# Altium PCB RS-119-8912.PcbDoc (part 1 of 2)
Units mm, origin at the board's own origin, x right, y up, seen from the top; angles counter-clockwise.
Board outline 125 x 120.8 mm, 2 copper layers (Top Layer, Bottom Layer); 161 components, 141 nets, 539 pads, 141 vias.
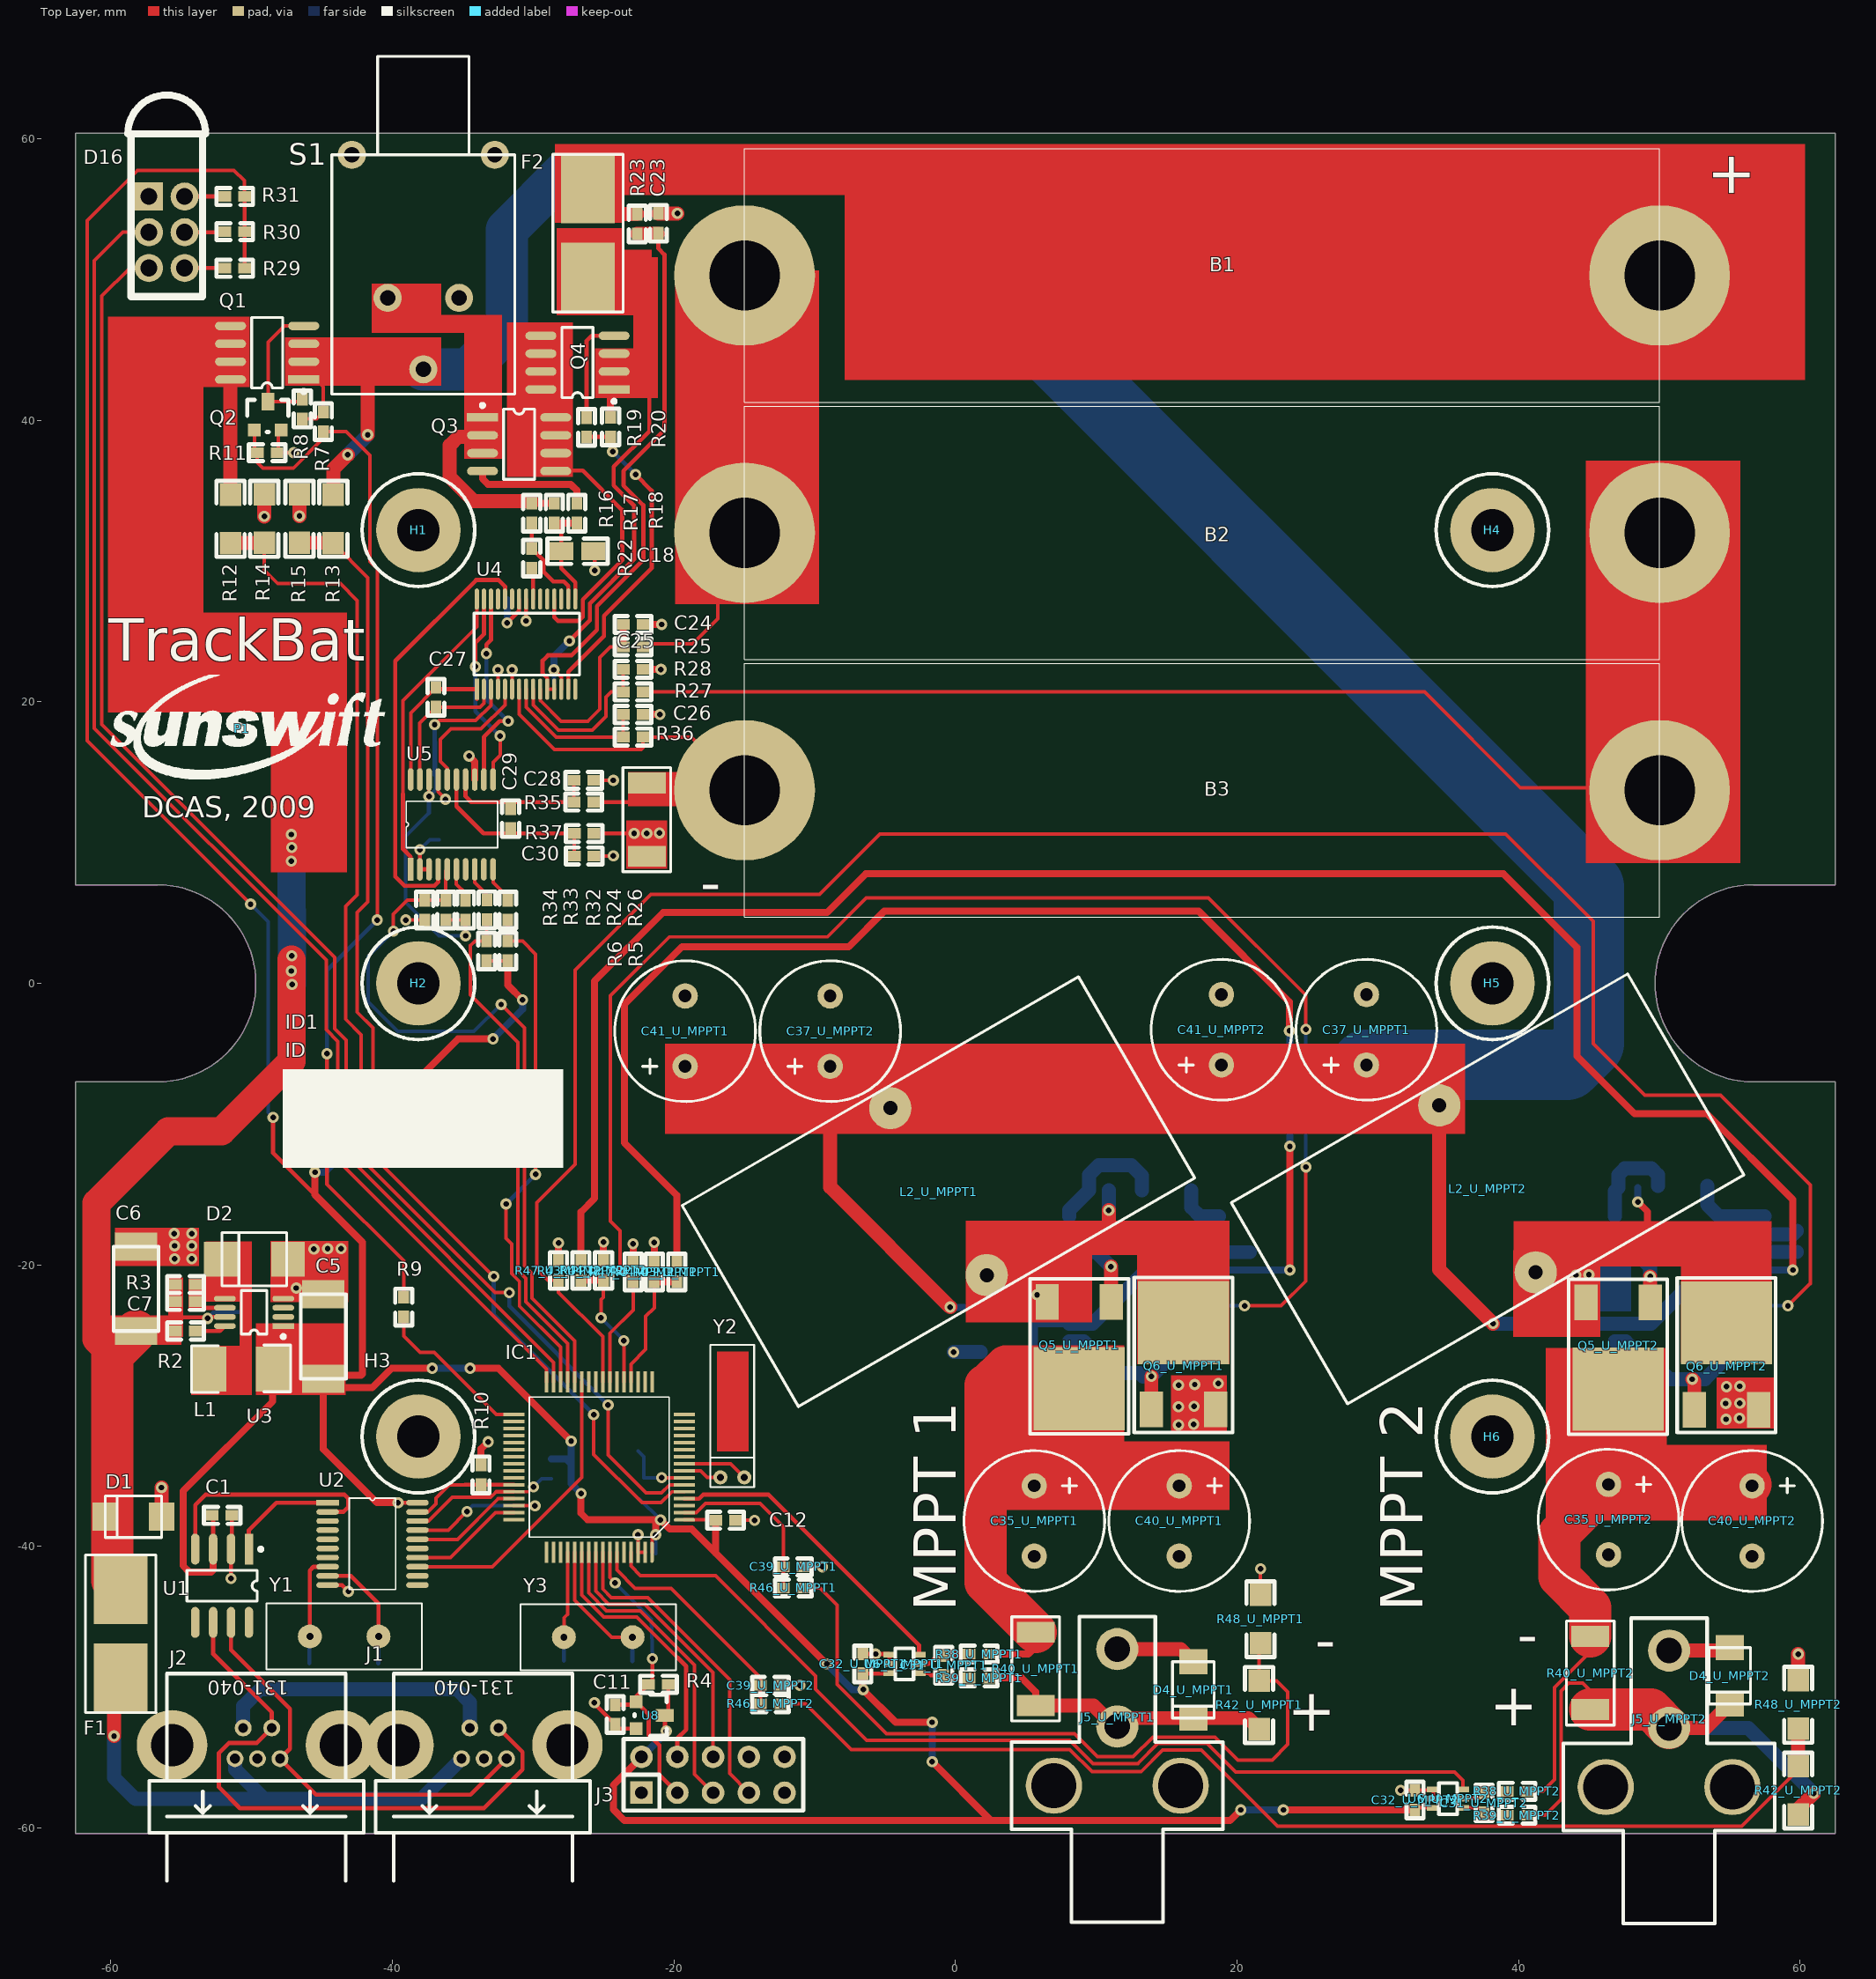
[diagram p0: Top Layer view]
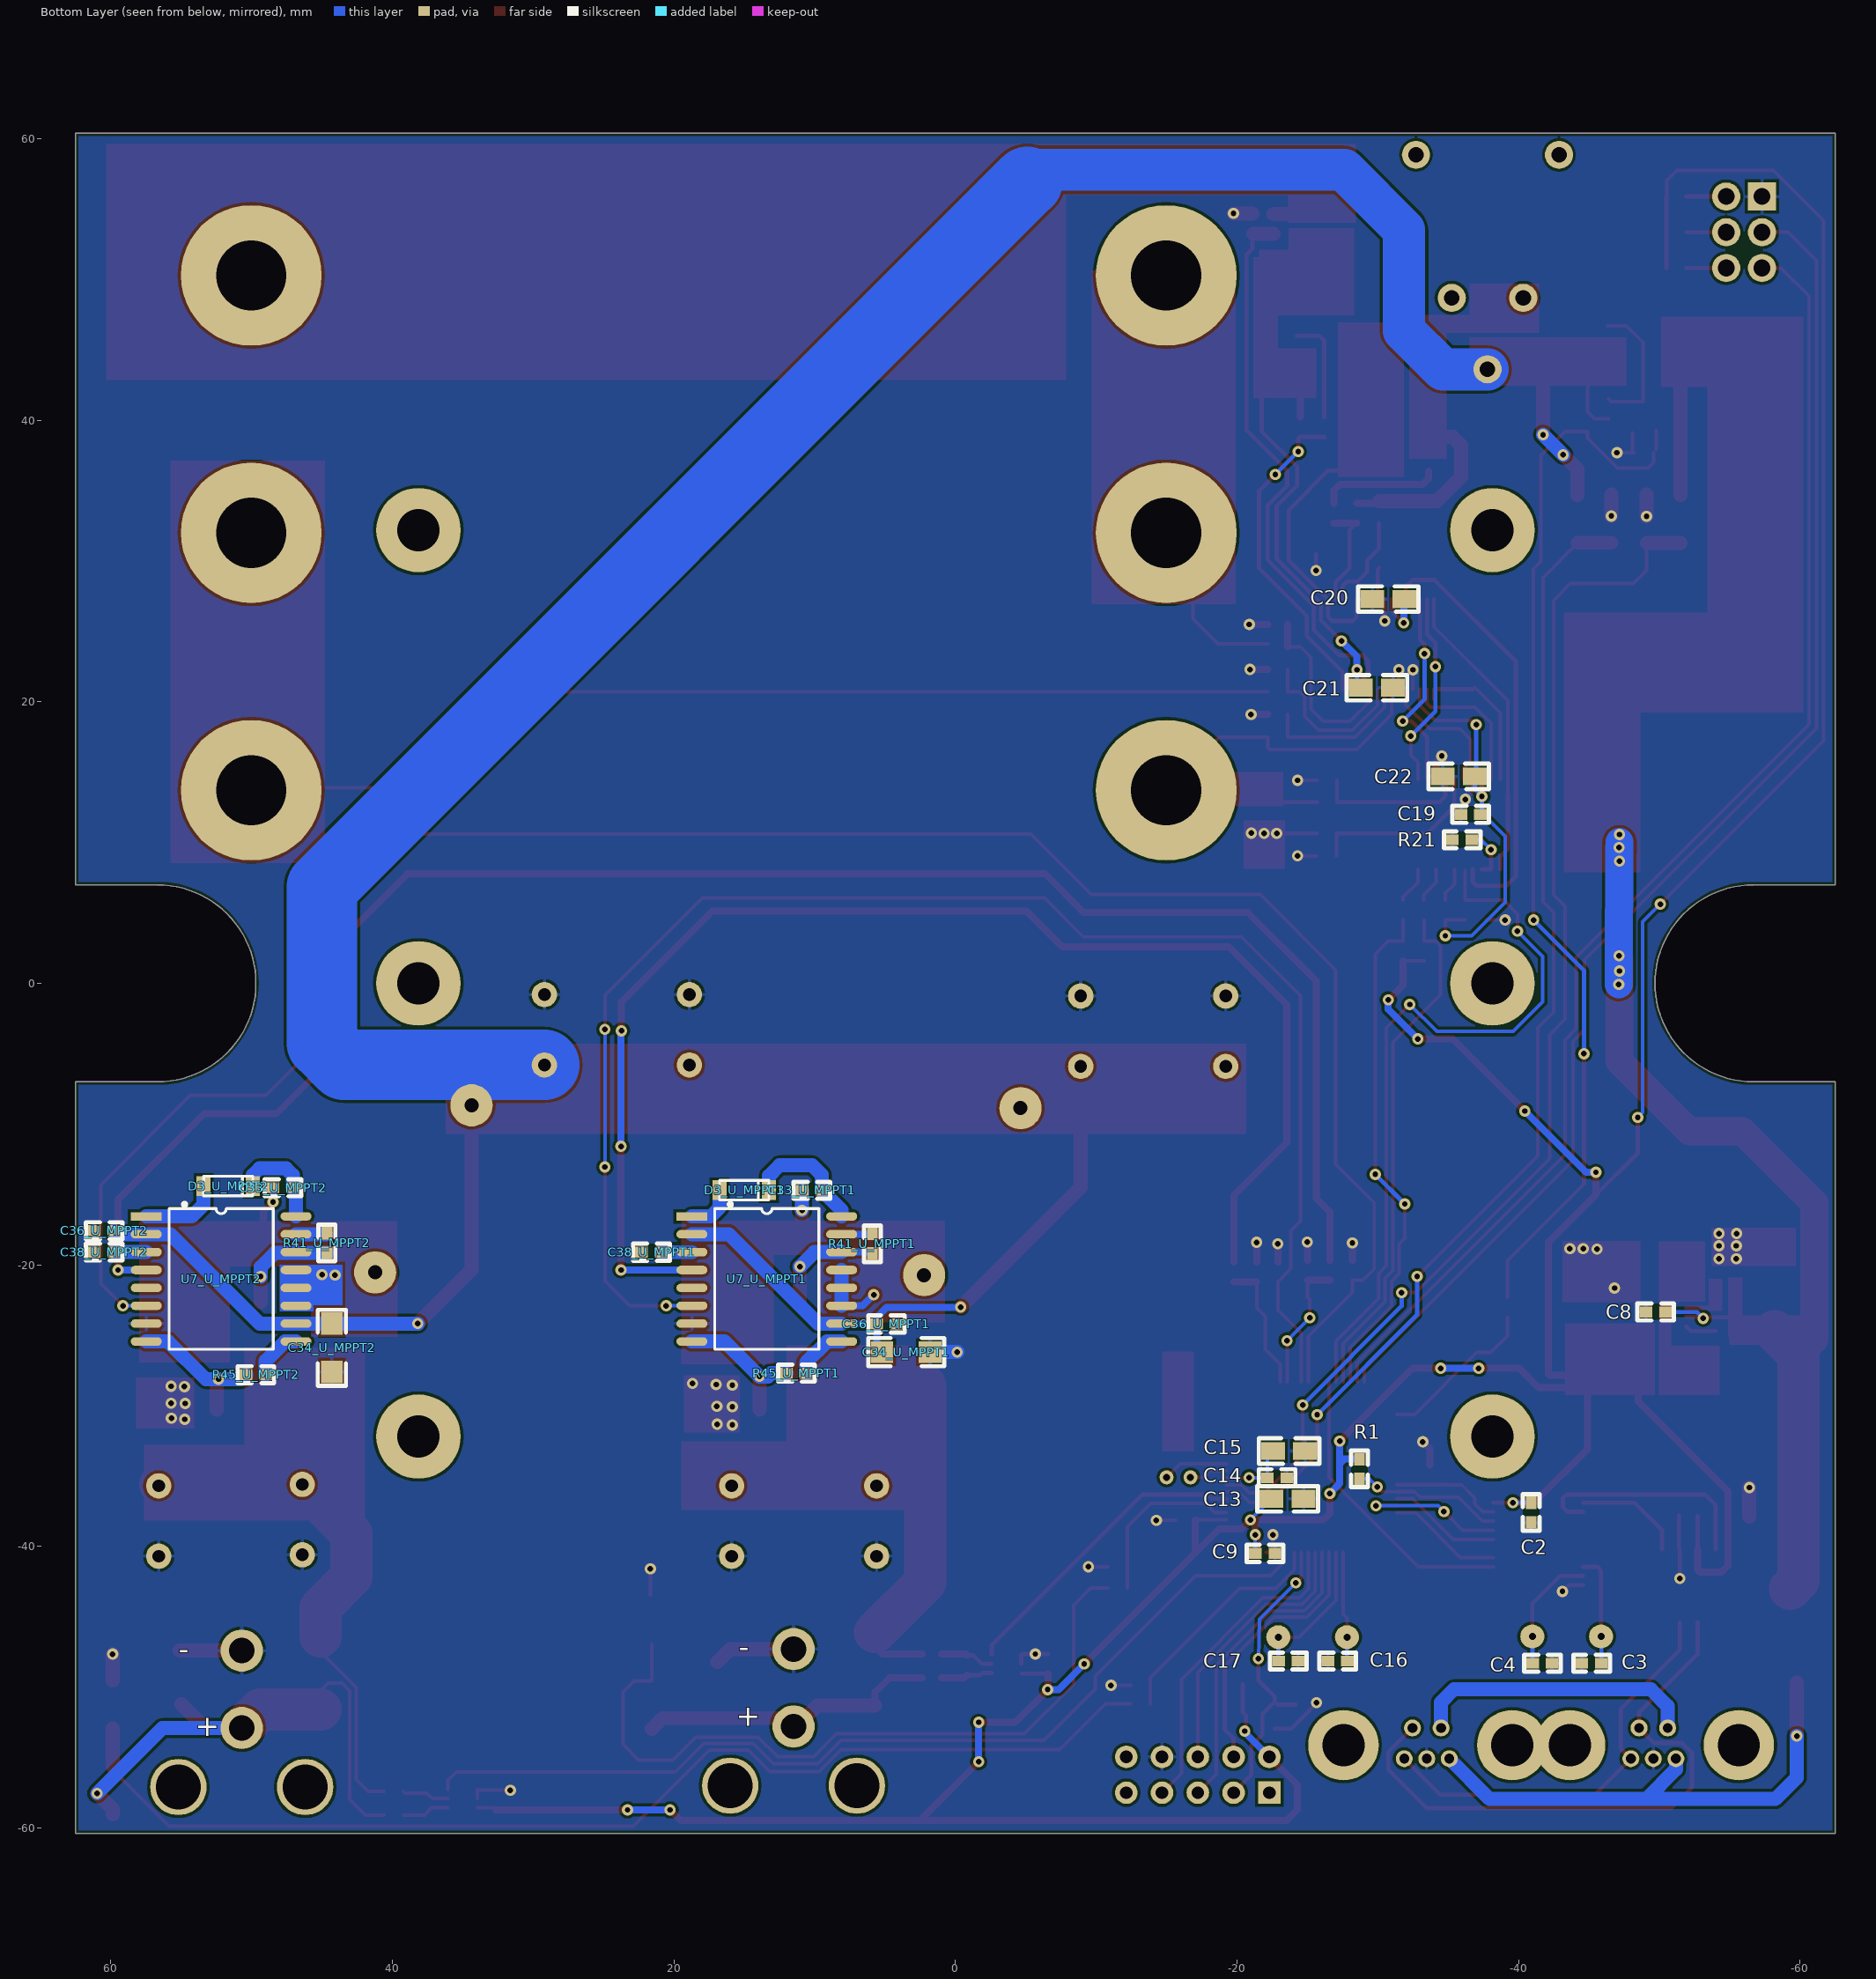
[diagram p1: Bottom Layer view, seen from below]

## Layer stack, top to bottom
Top Layer: signal copper 0.0356
Dielectric: dielectric 0.32, FR-4, Dk 4.8
Bottom Layer: signal copper 0.0356

## Board outline
-62.5,-60.4 -62.5,-7 -56.7,-7 ccw(c-56.7,0) -56.7,7 -62.5,7 -62.5,60.4 62.5,60.4 62.5,7 56.7,7 ccw(c56.7,0) 56.7,-7 62.5,-7 62.5,-60.4

## Design rules (kind name [scope] priority, off if disabled: settings)
Clearance [All] p1: gap=0.2
ComponentClearance [All] p1: gap=0.1 collisioncheckmode=3 verticalgap=0.2
Height [All] p1: minheight=0 maxheight=45 prefheight=12.7
HoleSize [All] p1: absolutevalues=TRUE maxlimit=10 minlimit=0.3 maxpercent=80.000 minpercent=20.000
PolygonConnect [All] p1: connectstyle=Relief reliefconductorwidth=0.254 reliefentries=4 polygonreliefangle="90 Angle"
RoomDefinition "Unisolated CAN" [InComponentClass('Unisolated CAN')] p1: confinementstyle=ConfineIn formatcopy=TRUE lockcomponents=FALSE outline -62,-52.087 -62,-40.313 -61.502,-40.313 -61.502,-36.225 -41.752,-36.225 -41.752,-36.048 -29.552,-36.048 -29.552,-32.948 -27.848,-32.948 -27.848,-48.812 -24.864,-48.812 -24.864,-63.998 -58.356,-63.998 -58.356,-52.087
RoomDefinition U_3V-Switcher-50mA [InComponentClass('U_3V-Switcher-50mA')] p2: confinementstyle=ConfineIn formatcopy=TRUE lockcomponents=FALSE outline -60.181,-26.056 -60.181,-17.344 -56.219,-17.344 -56.219,-17.346 -45.859,-17.346 -45.859,-20.744 -42.919,-20.744 -42.919,-29.456 -46.881,-29.456 -46.881,-29.415 -54.626,-29.415 -54.626,-26.056
RoutingVias [All] p1: holewidth=0.4 width=0.8 viastyle="Through Hole" minholewidth=0.4 minwidth=0.8 maxholewidth=0.4 maxwidth=0.8
SolderMaskExpansion [All] p1: expansion=0.102
TestPointUsage [All] p1: valid=0 allowmultiple=FALSE
Testpoint [All] p1: side=15 testpointundercomponent=TRUE minsize=1.016 maxsize=2.54 preferedsize=1.524 minholesize=0 maxholesize=1.016 preferedholesize=0.813 testpointgrid=0.025 style=1023 order=0123456789
Width [All] p1: maxlimit=10 minlimit=0.2 preferedwidth=0.254 toplayer_prefwidth=0.3 bottomlayer_prefwidth=0.25 minimp=50.000000 maximp=50.000000 favimp=50.000000
15 further rules are at their usual default settings.

## Classes and differential pairs
channel class MPPT: U_MPPT1 U_MPPT2
component class "Unisolated CAN": C1 C2 C3 C4 D1 F1 J1 J2 R1 U1 U2 Y1
component class U_MPPT2: C31_U_MPPT2 C32_U_MPPT2 C33_U_MPPT2 C34_U_MPPT2 C35_U_MPPT2 C36_U_MPPT2 C37_U_MPPT2 C38_U_MPPT2 C39_U_MPPT2 C40_U_MPPT2 C41_U_MPPT2 D3_U_MPPT2 D4_U_MPPT2 J5_U_MPPT2 L2_U_MPPT2 Q5_U_MPPT2 Q6_U_MPPT2 R38_U_MPPT2 R39_U_MPPT2 R40_U_MPPT2 R41_U_MPPT2 R42_U_MPPT2 R43_U_MPPT2 R44_U_MPPT2 R45_U_MPPT2 R46_U_MPPT2 R47_U_MPPT2 R48_U_MPPT2 U6_U_MPPT2 U7_U_MPPT2
component class U_MPPT1: C31_U_MPPT1 C32_U_MPPT1 C33_U_MPPT1 C34_U_MPPT1 C35_U_MPPT1 C36_U_MPPT1 C37_U_MPPT1 C38_U_MPPT1 C39_U_MPPT1 C40_U_MPPT1 C41_U_MPPT1 D3_U_MPPT1 D4_U_MPPT1 J5_U_MPPT1 L2_U_MPPT1 Q5_U_MPPT1 Q6_U_MPPT1 R38_U_MPPT1 R39_U_MPPT1 R40_U_MPPT1 R41_U_MPPT1 R42_U_MPPT1 R43_U_MPPT1 R44_U_MPPT1 R45_U_MPPT1 R46_U_MPPT1 R47_U_MPPT1 R48_U_MPPT1 U6_U_MPPT1 U7_U_MPPT1
component class U_Battery: B1 B2 B3 C18 C19 C20 C21 C22 C23 C24 C25 C26 C27 C28 C29 C30 F2 J4 Q3 Q4 R16 R17 R18 R19 R20 R21 R22 R23 R24 R25 R26 R27 R28 R32 R33 R34 R35 R36 R37 U4 U5
component class U_3V-Switcher-50mA: C5 C6 C7 C8 D2 L1 R2 R3 U3
component class TopLevel: D16 H1 H2 H3 H4 H5 H6 ID1 P1 Q1 Q2 R5 R6 R7 R8 R9 R10 R11 R12 R13 R14 R15 R29 R30 R31 S1
component class MSP430: C9 C10 C11 C12 C13 C14 C15 C16 C17 IC1 J3 R4 U8 Y2 Y3

## Components (designator, comment, footprint, x,y, rotation, side; value= is the part's Value field where it differs from the comment)
B1 "BATT" StandardLiIonCell 17.526,50.292 r270 top
B2 "BATT" StandardLiIonCell 17.526,32.004 r90 top
B3 "BATT" StandardLiIonCell 17.526,13.716 r270 top
C1 "100nF" 0603 -51.4,-37.8 r180 top
C2 "100nF" 0603 -40.9,-36.9 r270 bottom
C3 "30pF" 0603 -44.5,-48.3 r180 bottom
C4 "30pF" 0603 -42.4,-48.3 r0 bottom
C5 "4u7 35V" MCCT-CASEC -44.9,-28.1 r90 top
C6 "4u7 35V" MCCT-CASEC -58.2,-24.7 r90 top
C7 "1n" 0603 -55.4,-22.6 r0 top
C8 "100nF" 0603 -50.45,-23.35 r0 bottom
C9 "100nF" 0603 -21.3,-40.5 r180 bottom
C11 "10n" 0603 -24.175,-51.25 r270 top
C12 "100nF" 0603 -17.025,-38.15 r0 top
C13 "10u" 0805 -22.45,-36.625 r180 bottom
C14 "100nF" 0603 -22.15,-35.125 r180 bottom
C15 "10u" 0805 -22.55,-33.225 r180 bottom
C16 "18pF" 0603 -27.85,-48.15 r0 bottom
C17 "18pF" 0603 -22.95,-48.15 r180 bottom
C18 "1uF" 0805 -28,30.7 r0 top
C19 "100nF" 0603 -37.3,12 r0 bottom
C20 "4.7uF" 0805 -31.9,27.3 r0 bottom
C21 "1uF" 0805 -28.8,21 r180 bottom
C22 "1uF" 0805 -36.9,14.7 r0 bottom
C23 "100nF" 0603 -21.1,53.3 r90 top
C24 "100nF" 0603 -23.6,25.5 r0 top
C25 "100nF" 0603 -23.6,22.3 r0 top
C26 "100nF" 0603 -23.6,19.1 r0 top
C27 "100nF" 0603 -36.9,19.625 r90 top
C28 "100nF" 0603 -27.1,14.425 r0 top
C29 "100nF" 0603 -31.6,12.4 r270 top
C30 "100nF" 0603 -27.075,9.05 r0 top
C31_U_MPPT1 "100n" 0603 -0.825,-47.75 r270 top (schematic designator C31)
C31_U_MPPT2 "100n" 0603 37.55,-57.525 r270 top (schematic designator C31)
C32_U_MPPT1 "100n" 0603 -6.575,-47.65 r270 top (schematic designator C32)
C32_U_MPPT2 "100n" 0603 32.65,-57.325 r270 top (schematic designator C32)
C33_U_MPPT1 "100n" 0603 9.5,-14.7 r0 bottom (schematic designator C33)
C33_U_MPPT2 "100n" 0603 47.084,-14.524 r0 bottom (schematic designator C33)
C34_U_MPPT1 "10u" 1206 1.8,-26.2 r0 bottom (schematic designator C34)
C34_U_MPPT2 "10u" 1206 44.3,-27.6 r90 bottom (schematic designator C34)
C35_U_MPPT1 "330u" RAD0.2 5.6,-35.7 r270 top (schematic designator C35)
C35_U_MPPT2 "330u" RAD0.2 46.4,-35.6 r270 top (schematic designator C35)
C36_U_MPPT1 "100n" 0603 5.6,-24.2 r180 bottom (schematic designator C36)
C36_U_MPPT2 "100n" 0603 59.784,-17.572 r0 bottom (schematic designator C36)
C37_U_MPPT1 "330u" RAD0.2 29.2,-5.8 r90 top (schematic designator C37)
C37_U_MPPT2 "330u" RAD0.2 -8.9,-5.9 r90 top (schematic designator C37)
C38_U_MPPT1 "100n" 0603 20.9,-19.1 r0 bottom (schematic designator C38)
C38_U_MPPT2 "100n" 0603 59.784,-19.096 r0 bottom (schematic designator C38)
C39_U_MPPT1 "10n" 0603 -12.225,-41.45 r0 top (schematic designator C39)
C39_U_MPPT2 "10n" 0603 -13.85,-49.875 r0 top (schematic designator C39)
C40_U_MPPT1 "330u" RAD0.2 15.9,-35.7 r270 top (schematic designator C40)
C40_U_MPPT2 "330u" RAD0.2 56.6,-35.7 r270 top (schematic designator C40)
C41_U_MPPT1 "330u" RAD0.2 -19.2,-5.9 r90 top (schematic designator C41)
C41_U_MPPT2 "330u" RAD0.2 18.9,-5.8 r90 top (schematic designator C41)
D1 "12V Transient Suppressor" SMA -58.4,-37.9 r180 top
D2 "MBRS130" SMB -49.8,-19.6 r180 top
D3_U_MPPT1 "LS4148" QMELF 15,-14.7 r180 bottom (schematic designator D3)
D3_U_MPPT2 "LS4148" QMELF 51.659,-14.397 r180 bottom (schematic designator D3)
D4_U_MPPT1 "30V Transient Suppressor" SMA 16.9,-50.2 r270 top (schematic designator D4)
D4_U_MPPT2 "30V Transient Suppressor" SMA 55,-49.2 r270 top (schematic designator D4)
D16 "1882-2781" LED_TRILEVEL -57.3,55.9 r0 top
F1 "125mA/3A" LITTELFUSE-154 -59.3,-46.2 r90 top
F2 "5A" LITTELFUSE-154 -26.1,53.3 r270 top
H1 "HOLE" M3 -38.15,32.2 r0 top
H2 "HOLE" M3 -38.15,0 r0 top
H3 "HOLE" M3 -38.15,-32.2 r0 top
H4 "HOLE" M3 38.15,32.2 r0 top
H5 "HOLE" M3 38.15,0 r0 top
H6 "HOLE" M3 38.15,-32.2 r0 top
IC1 "MSP430F24X" QFP64 -19.25,-38.125 r180 top
ID1 "IDBOX" IDBOX -47.8,-6.1 r0 top
J1 "CON5-S" TRIAD5F -34.5,-52.9 r180 top
J2 "CON5-S" TRIAD5F -50.6,-52.9 r180 top
J3 "Tritium JTAG Connector" IDC10 -22.3,-57.5 r0 top
J5_U_MPPT1 "MINIFIT JR" MINIFITJR-2 11.5,-52.8 r0 top (schematic designator J5)
J5_U_MPPT2 "MINIFIT JR" MINIFITJR-2 50.7,-52.9 r0 top (schematic designator J5)
L1 "330uH" 1812 -53,-27.4 r0 top
L2_U_MPPT1 "680uH" Bourns2321-V-RC -1.2,-14.8 r30 top (schematic designator L2)
L2_U_MPPT2 "680uH" Bourns2321-V-RC 37.8,-14.6 r30 top (schematic designator L2)
P1 "SUN_LOGO" SUNSWIFTLOGO -50.7,18.1 r0 top
Q1 "SI4425DY" SO8 -48.9,44.8 r90 top
Q2 "ZXM61N03F" SOT23(3) -49.8,39.3 r0 top
Q3 "FDS6690A" SO8 -31,38.3 r270 top
Q4 "FDS6690A" SO8 -26.85,44.1 r90 top
Q5_U_MPPT1 "STD60NF06" DPAK(3) 8.8,-28.8 r180 top (schematic designator Q5)
Q5_U_MPPT2 "STD60NF06" DPAK(3) 47.075,-28.825 r180 top (schematic designator Q5)
Q6_U_MPPT1 "STD60NF06" DPAK(3) 16.2,-24.1 r0 top (schematic designator Q6)
Q6_U_MPPT2 "STD60NF06" DPAK(3) 54.775,-24.125 r0 top (schematic designator Q6)
R1 "10k" 0603 -28.7,-35.2 r90 bottom
R2 "100k" 0603 -54,-24.7 r180 top
R3 "1R2" 0603 -55.4,-21.4 r0 top
R4 "10k" 0603 -21.8,-49.8 r0 top
R5 "10K" 0603 -31.8,3 r270 top
R6 "10K" 0603 -33.3,3 r270 top
R7 "DNP" 0603 -44.9,39.2 r90 top
R8 "10K" 0603 -46.4,41.5 r270 top
R9 "100R" 0603 -39.2,-23.7 r90 top
R10 "10k" 0603 -33.7,-35.62 r90 top
R11 "10K" 0603 -48.2,37.7 r180 top
R12 "100k" 1206 -51.5,34.7 r270 top
R13 "100k" 1206 -44.2,34.7 r270 top
R14 "20K" 1206 -49.1,31.3 r90 top
R15 "20K" 1206 -46.6,31.3 r90 top
R16 "10k" 0603 -30.1,32.7 r90 top
R17 "3M" 0603 -28.5,32.7 r90 top
R18 "1K" 0603 -26.9,32.7 r90 top
R19 "1K" 0603 -26.2,38.8 r90 top
R20 "3M" 0603 -24.5,38.825 r90 top
R21 "1K" 0603 -35.3,10.2 r180 bottom
R22 "100K" 0603 -30.1,30.9 r270 top
R23 "100R" 0603 -22.6,53.25 r90 top
R24 "100R" 0603 -33.275,5.925 r270 top
R25 "100R" 0603 -23.6,23.9 r0 top
R26 "100R" 0603 -31.8,5.9 r270 top
R27 "100R" 0603 -23.6,20.7 r0 top
R28 "100R" 0603 -23.6,17.5 r0 top
R29 "1K" 0603 -50.5,50.8 r180 top
R30 "1K" 0603 -50.5,53.4 r180 top
R31 "1K" 0603 -50.5,55.9 r180 top
R32 "1K" 0603 -34.8,5.9 r270 top
R33 "DNP" 0603 -36.2,5.9 r270 top
R34 "DNP" 0603 -37.7,4.5 r90 top
R35 "1K" 0603 -27.1,12.875 r0 top
R36 "0R01" 2010 -21.925,11.625 r270 top
R37 "1K" 0603 -27.075,10.65 r0 top
R38_U_MPPT1 "1.5K" 0603 2.375,-47.65 r180 top (schematic designator R38)
R38_U_MPPT2 "1.5K" 0603 40.6,-57.4 r180 top (schematic designator R38)
R39_U_MPPT1 "1.5K" 0603 2.375,-49.35 r180 top (schematic designator R39)
R39_U_MPPT2 "1.5K" 0603 40.6,-59.1 r180 top (schematic designator R39)
R40_U_MPPT1 "0R01" 2010 5.7,-48.7 r90 top (schematic designator R40)
R40_U_MPPT2 "0R01" 2010 45.1,-49 r90 top (schematic designator R40)
R41_U_MPPT1 "0R" 0603 5.9,-17.8 r270 bottom (schematic designator R41)
R41_U_MPPT2 "0R" 0603 44.65,-17.75 r270 bottom (schematic designator R41)
R42_U_MPPT1 "220k" 1206 21.575,-52.975 r90 top (schematic designator R42)
R42_U_MPPT2 "220k" 1206 59.873,-59.046 r90 top (schematic designator R42)
R43_U_MPPT1 "0R" 0603 -19.8,-21.2 r90 top (schematic designator R43)
R43_U_MPPT2 "0R" 0603 -26.6,-21.1 r90 top (schematic designator R43)
R44_U_MPPT1 "10k" 0603 -21.4,-19.8 r270 top (schematic designator R44)
R44_U_MPPT2 "10k" 0603 -25,-19.7 r270 top (schematic designator R44)
R45_U_MPPT1 "0R" 0603 10.6,-27.7 r0 bottom (schematic designator R45)
R45_U_MPPT2 "0R" 0603 49,-27.8 r0 bottom (schematic designator R45)
R46_U_MPPT1 "20K" 0603 -10.825,-42.95 r180 top (schematic designator R46)
R46_U_MPPT2 "20K" 0603 -12.45,-51.175 r180 top (schematic designator R46)
R47_U_MPPT1 "10k" 0603 -22.9,-21.2 r90 top (schematic designator R47)
R47_U_MPPT2 "10k" 0603 -28.2,-21.1 r90 top (schematic designator R47)
R48_U_MPPT1 "20K" 1206 21.675,-46.875 r90 top (schematic designator R48)
R48_U_MPPT2 "20K" 1206 59.873,-52.95 r90 top (schematic designator R48)
S1 "*" SWITCH-21000N -37.8,48.7 r0 top
U1 "SN65HVD232" SO8 -52.1,-42.8 r180 top
U2 "MCP2515X/ST" TSSOP20 -44.6,-36.9 r0 top
U3 "LTC1474" TSOP8 -47.75,-24.35 r180 top
U4 "BQ29330" TSSOP30 -34,20.9 r90 top
U5 "BQ20Z70" TSSOP20 -38.7,8.1 r90 top
U6_U_MPPT1 "INA214" SC70-6 -4.675,-48.35 r270 top (schematic designator U6)
U6_U_MPPT2 "INA214" SC70-6 33.95,-57.925 r270 top (schematic designator U6)
U7_U_MPPT1 "LT1158" SOL16 13.4,-21 r270 bottom (schematic designator U7)
U7_U_MPPT2 "LT1158" SOL16 52.167,-21.001 r270 bottom (schematic designator U7)
U8 "XC61CN2002MR" SOT23(3) -22.675,-51.05 r270 top
Y1 "16MHz" HC49/4H -37.9,-46.4 r180 top
Y2 "32.768 KHz" WATCHA -16.7,-35.1 r0 top
Y3 "7.3728 MHz" HC49/4H -19.85,-46.45 r180 top

## Footprints (in the part's own frame and the unit in brackets; to place one, negate y for a bottom-side part, rotate by r counter-clockwise, add the part's x,y. Pads: shape width x height; smd on the part's side, far side on the other; paste and mask are expansions set on the pad)
0603 [mil]
  rect 35.43x30 smd: 1(0,0) 2(55,0)
  silkscreen extent -24,-24 79,24
0805 [mm]
  rect 1.7x1.27 smd: 1(0,0) 2(2.286,0)
  silkscreen extent -1,-0.9 3.3,0.9
1206 [mil]
  rect 62.99x60 smd: 1(0,0) 2(135,0)
  silkscreen extent -39,-39 173,39
1812 [mm]
  rect 2.4x3.2 smd: 1(0,0) 2(4.5,0)
  silkscreen extent -1.27,-1.66 5.77,1.7
2010 [mm]
  rect 1.5x2.7 smd: 1(-2.6,0) 2(2.6,0)
  silkscreen extent -3.7,-1.7 3.7,1.7
Bourns2321-V-RC [mm] "Toroidal inductor"
  round 3 hole 1: 1(0,-6.85) 2(0,6.85)
  silkscreen extent -16.26,-8.25 16.26,8.25
DPAK(3) [mm]
  rect 1.65x2.54 smd: 1(-2.28,-6.17) 3(2.28,-6.17)
  rect 6.48x5.9 smd: 2(0,0)
  silkscreen extent -3.5,-7.8 3.5,3.2
HC49/4H [mm]
  round 1.7 hole 0.5: 1(3.085,0) 2(7.965,0)
  silkscreen extent 0,-2.35 11.05,2.35
IDBOX [mm] "Infobox"
  silkscreen extent 0,-7 19.95,0
IDC10 [mm]
  rect 1.6x1.6 hole 0.9: 1(0,0)
  round 1.6 hole 0.9: 2(0,2.54) 3(2.54,0) 4(2.54,2.54) 5(5.08,0) 6(5.08,2.54) 7(7.62,0) 8(7.62,2.54) 9(10.16,0) 10(10.16,2.54)
  silkscreen extent -1.27,-1.27 11.5,3.81
LED_TRILEVEL [mm]
  rect 2x2 hole 1.2: 1(0,0)
  round 2 hole 1.2: 2(0,-2.54) 3(0,-5.08) 4(2.54,-5.08) 5(2.54,-2.54) 6(2.54,0)
  silkscreen extent -1.49,-7.11 4.03,7.21
LITTELFUSE-154 [mm]
  rect 5x3.81 smd: 1(-3.185,0) 2(3.185,0)
  silkscreen extent -5.6,-2.51 5.6,2.5
M3 [mm]
  round 6 hole 3: 1(0,0)
  silkscreen extent -4,-4 4,4
MCCT-CASEC [mm]
  rect 2x3 smd: 1(0,0) 2(6,0)
  silkscreen extent 0,-1.6 6,1.6
MINIFITJR-2 [mm]
  round 4 hole 3.2: 0(-4.5,-4.2) 0(4.5,-4.2)
  round 3 hole 1.8: 1(0,0) 2(0,5.5)
  silkscreen extent -7.5,-13.9 7.5,7.8
QFP64 [mm]
  oval 1.5x0.25 smd: 1(0.008,-0.005)
  rect 1.5x0.25 smd: 2(0.008,-0.505) 3(0.008,-1.005) 4(0.008,-1.505) 5(0.008,-2.005) 6(0.008,-2.505) 7(0.008,-3.005) 8(0.008,-3.505) 9(0.008,-4.005) 10(0.008,-4.505) 11(0.008,-5.005) 12(0.008,-5.505) 13(0.008,-6.005) 14(0.008,-6.505) 15(0.008,-7.005) 16(0.008,-7.505) 33(12.108,-7.505) 34(12.108,-7.005) 35(12.108,-6.505) 36(12.108,-6.005) 37(12.108,-5.505) 38(12.108,-5.005) 39(12.108,-4.505) 40(12.108,-4.005) 41(12.108,-3.505) 42(12.108,-3.005) 43(12.108,-2.505) 44(12.108,-2.005) 45(12.108,-1.505) 46(12.108,-1.005) 47(12.108,-0.505) 48(12.108,-0.005)
  rect 0.25x1.5 smd: 17(2.308,-9.805) 18(2.808,-9.805) 19(3.308,-9.805) 20(3.808,-9.805) 21(4.308,-9.805) 22(4.808,-9.805) 23(5.308,-9.805) 24(5.808,-9.805) 25(6.308,-9.805) 26(6.808,-9.805) 27(7.308,-9.805) 28(7.808,-9.805) 29(8.308,-9.805) 30(8.808,-9.805) 31(9.308,-9.805) 32(9.808,-9.805) 49(9.808,2.295) 50(9.308,2.295) 51(8.808,2.295) 52(8.308,2.295) 53(7.808,2.295) 54(7.308,2.295) 55(6.808,2.295) 56(6.308,2.295) 57(5.808,2.295) 58(5.308,2.295) 59(4.808,2.295) 60(4.308,2.295) 61(3.808,2.295) 62(3.308,2.295) 63(2.808,2.295)
  oval 0.25x1.5 smd: 64(2.308,2.295)
  silkscreen extent 1.09,-8.72 11.02,1.21
QMELF [mm] "QMELF"
  rect 1x1.4 smd: A(-1.75,0) K(1.75,0)
  silkscreen extent -1.75,-0.7 1.75,0.7
RAD0.2 [mm]
  round 1.8 / inner round 1.4 / far side round 1.8 hole 0.9: 1(0,0) 2(5,0)
  silkscreen extent -2.5,-5 7.5,5
SC70-6 [mm]
  rect 0.4x0.9 smd: 1(-0.65,0) 2(0,0) 3(0.65,0) 4(0.65,2.1) 5(0,2.1) 6(-0.65,2.1)
  silkscreen extent -1.1,0.4 1.1,1.7
SMA [mm]
  rect 1.8x2 smd: A(-2,0) K(2,0)
  silkscreen extent -2,-1.48 2,1.48
SMB [mm]
  rect 2.4x2.5 smd: A(-2.385,0) K(2.385,0)
  silkscreen extent -2.28,-1.9 2.3,1.9
SO8 [mm]
  rect 0.6x2.2 smd: 1(-1.905,-2.6)
  oval 0.6x2.2 smd: 2(-0.635,-2.6) 3(0.635,-2.6) 4(1.905,-2.6) 5(1.905,2.6) 6(0.635,2.6) 7(-0.635,2.6) 8(-1.905,2.6)
  silkscreen extent -2.88,-2.72 2.5,1.1
SOL16 [mm]
  rect 0.6x2.2 smd: 1(-4.445,-5.32)
  oval 0.6x2.2 smd: 2(-3.175,-5.32) 3(-1.905,-5.32) 4(-0.635,-5.32) 5(0.635,-5.32) 6(1.905,-5.32) 7(3.175,-5.32) 8(4.445,-5.32) 9(4.445,5.32) 10(3.175,5.32) 11(1.905,5.32) 12(0.635,5.32) 13(-0.635,5.32) 14(-1.905,5.32) 15(-3.175,5.32) 16(-4.445,5.32)
  silkscreen extent -5.42,-3.7 5,3.7
SOT23(3) [mil]
  rect 36x36 smd: 1(0,0) 2(75,0)
  rect 36x50 smd: 3(38,80)
  silkscreen extent -20,-5 95,85
StandardLiIonCell [mm] "One of those standard LiIonCells that I don't know the part number for."
  round 10 hole 5: 1(0,32.5) 2(0,-32.5)
  silkscreen extent -9,-32.5 9,32.5
SUNSWIFTLOGO [mm] "Sunswift Logo"
  silkscreen extent -9.32,-3.58 10.19,3.81
SWITCH-21000N [mm] "21000N series toggleswitch"
  round 2 hole 1.1: 0(-5.08,10.16) 0(5.08,10.16) 1(-2.54,0) 2(0,-5.08) 3(2.54,0)
  silkscreen extent -6.5,-6.85 6.5,17.16
TRIAD5F [mm]
  round 5 hole 3: 0(-6.934,1.219) 0(5.055,1.219)
  round 1.2 hole 0.7: 1(0,0) 2(0.584,2.184) 3(-1.016,2.184) 4(-2.616,2.184) 5(-2.032,0)
  silkscreen extent -8.56,-3.86 6.68,10.87
TSOP8 [mm]
  rect 1.55x0.4 smd: 1(0,0)
  oval 1.55x0.4 smd: 2(0,-0.65) 3(0,-1.3) 4(0,-1.95) 5(4.15,-1.95) 6(4.15,-1.3) 7(4.15,-0.65) 8(4.15,0)
  silkscreen extent -0.13,-2.52 2.98,0.87
TSSOP20 [mm]
  rect 1.6x0.4 smd: 1(0,0)
  oval 1.6x0.4 smd: 2(0,-0.65) 3(0,-1.3) 4(0,-1.95) 5(0,-2.6) 6(0,-3.25) 7(0,-3.9) 8(0,-4.55) 9(0,-5.2) 10(0,-5.85) 11(6.38,-5.85) 12(6.38,-5.2) 13(6.38,-4.55) 14(6.38,-3.9) 15(6.38,-3.25) 16(6.38,-2.6) 17(6.38,-1.95) 18(6.38,-1.3) 19(6.38,-0.65) 20(6.38,0)
  silkscreen extent 1.53,-6.18 4.85,0.33
TSSOP30 [mm] "TI DBT package with 30 pins"
  rect 1.5x0.3 smd: 1(0,0)
  oval 1.5x0.3 smd: 2(0,-0.5) 3(0,-1) 4(0,-1.5) 5(0,-2) 6(0,-2.5) 7(0,-3) 8(0,-3.5) 9(0,-4) 10(0,-4.5) 11(0,-5) 12(0,-5.5) 13(0,-6) 14(0,-6.5) 15(0,-7) 16(6.4,-7) 17(6.4,-6.5) 18(6.4,-6) 19(6.4,-5.5) 20(6.4,-5) 21(6.4,-4.5) 22(6.4,-4) 23(6.4,-3.5) 24(6.4,-3) 25(6.4,-2.5) 26(6.4,-2) 27(6.4,-1.5) 28(6.4,-1) 29(6.4,-0.5) 30(6.4,0)
  silkscreen extent 1,-7.3 5.4,0.2
WATCHA [mm]
  round 1 hole 0.5: 1(0,0) 2(1.7,0)
  Top Layer region: -0.25,1.85 2,1.85 2,8.95 -0.25,8.95
  silkscreen extent -0.7,-0.7 2.4,9.4

## Part data
C1 C2 C3 C4 C7 C8 C9 C11 C12 C14 C16 C17 C18 C19 C20 C21 C22 C23 C24 C25 C26 C27 C28 C29 C30 C31_U_MPPT1 C31_U_MPPT2 C32_U_MPPT1 C32_U_MPPT2 C33_U_MPPT1 C33_U_MPPT2 C34_U_MPPT1 C34_U_MPPT2 C36_U_MPPT1 C36_U_MPPT2 C38_U_MPPT1 C38_U_MPPT2 C39_U_MPPT1 C39_U_MPPT2: library part CAP, "Capacitor"
C5 C6 C13 C15: library part "Cap Pol3", "Polarized Capacitor (Surface Mount)"
C35_U_MPPT1 C35_U_MPPT2 C37_U_MPPT1 C37_U_MPPT2 C40_U_MPPT1 C40_U_MPPT2 C41_U_MPPT1 C41_U_MPPT2: library part "CAP POL3", "Polarized Capacitor (Surface Mount)"
D1 D3_U_MPPT1 D3_U_MPPT2 D4_U_MPPT1 D4_U_MPPT2: library part DIODE, "Diode"
D2: library part "D SCHOTTKY", "Schottky Diode"
D16: library part LED-TRILEVEL, "Three level LED"
F1 F2: library part FUSE2, "Fuse"
H1 H2 H3 H4 H5 H6: "Hole"
J1 J2: "Connector, 2 pin, with shield @ S"
J3: library part 430F_JTAG_TRITIUM, "Tritium JTAG interface for MSP430"
J5_U_MPPT1 J5_U_MPPT2: library part CON2
L1 L2_U_MPPT1 L2_U_MPPT2: library part Inductor, "Inductor"
Q1: "SI4425DY P Channel Mosfet"
Q2: library part ZXM61N02F, "1.7A, 20V N-Channel Enhancement mode FET"
Q3 Q4: "N-type MOSFET"
Q5_U_MPPT1 Q5_U_MPPT2 Q6_U_MPPT1 Q6_U_MPPT2: "Power MOSFET"
R1 R9 R12 R13 R14 R15 R42_U_MPPT1 R42_U_MPPT2 R48_U_MPPT1 R48_U_MPPT2: library part RES1
R2 R3 R4 R5 R6 R7 R8 R10 R11 R16 R17 R18 R19 R20 R21 R22 R23 R24 R25 R26 R27 R28 R29 R30 R31 R32 R33 R34 R35 R36 R37 R38_U_MPPT1 R38_U_MPPT2 R39_U_MPPT1 R39_U_MPPT2 R40_U_MPPT1 R40_U_MPPT2 R41_U_MPPT1 R41_U_MPPT2 R43_U_MPPT1 R43_U_MPPT2 R44_U_MPPT1 R44_U_MPPT2 R45_U_MPPT1 R45_U_MPPT2 R46_U_MPPT1 R46_U_MPPT2 R47_U_MPPT1 R47_U_MPPT2: library part RES1, "Resistor"
S1: library part SWITCH
U1: "3.3V CAN Transciever"
U2: library part MCP2510X/ST, "MCP2510 CAN Controller"
U3: "Step-down converter"
U6_U_MPPT1 U6_U_MPPT2: "High / Low side Current Sensor"
U8: library part XC61F, "SOT23 reset generator"
Y1 Y2 Y3: library part CRYSTAL, "Crystal"

## Via types
v1: diameter 0.8, hole 0.4, Top Layer to Bottom Layer, 141 vias

## Nets (pads, with @x,y where several pads share a name; then routed paths per layer and width w, separated by ;. In a path a pad name is that pad's centre, name@x,y a point inside that pad or via, vN(x,y) a via of type N, cw(c..) or ccw(c..) an arc to the next point about the centre after c; other vN are vias at no path point)
3V3: C1.2 C2.1 C5.1 C9.1 C12.1 C13.1 C32_U_MPPT1.2 C32_U_MPPT2.2 IC1.1 IC1.64 J3.2 L1.2 R1.2 R4.2 R5.2 R6.2 R29.1 R30.1 R31.1 U1.3 U2.20 U3.1 U6_U_MPPT1.3 U6_U_MPPT2.3 U8.3 | length 325.7
  Top Layer w0.25: R31.1@-50.5,55.9 -50.525,55.925 -50.525,57.025 -51.25,57.75 -58.1,57.75 -61.675,54.175 -61.675,17.225 v1(-50.075,5.625) ; R6.2@-33.3,1.603 R5.2@-31.728,1.603 ; IC1.64@-21.558,-40.42 -21.558,-39.133 v1@-21.525,-39.1 ; IC1.1@-19.258,-38.12 C12.1@-17.055,-38.12 ; C32_U_MPPT2.2@32.797,-58.575 U6_U_MPPT2.3@33.95,-58.575
  Top Layer w0.3: U1.3@-52.735,-40.2 C1.2@-52.735,-37.862 ; R29.1@-50.5,50.8 R31.1@-50.5,55.9 ; v1(-48.475,-9.525) -48.475,-12.05 -45.5,-15.025 ; C5.1@-44.9,-28.1 C5.1@-44.6,-28.1 ; v1(-39.6,-36.9) U2.20@-38.22,-36.9 ; v1(-20.55,-53.125) -20.643,-53.032 U8.3@-20.643,-52.015 -20.403,-51.775 R4.2@-20.403,-49.8 ; C32_U_MPPT1.2@-6.575,-49.047 U6_U_MPPT1.3@-4.722,-49.047
  Top Layer w0.5: U1.3@-52.735,-40.2 -52.735,-41.685 -52.875,-41.825 -54.425,-41.825 -54.875,-41.375 -54.875,-36.075 -48.5,-29.7 L1.2@-48.5,-27.4 ; v1(-45.5,-13.425) -45.5,-15.025 -42.125,-18.4 -42.125,-27.75 -42.225,-27.85 C5.1@-44.6,-27.85 ; C5.1@-44.9,-28.1 -44.9,-33.1 -41.1,-36.9 v1(-39.6,-36.9) ; C5.1@-44.675,-28.725 -41.425,-28.725 -40.05,-27.35 v1(-37.175,-27.35) ; v1(-40.45,-9.075) -35.325,-3.95 v1(-32.85,-3.95) ; v1(-34.475,-27.35) -32.475,-27.35 v1(-27.3,-32.525) ; R5.2@-31.8,1.603 -31.8,-0.125 v1(-30.75,-1.175) ; v1(-26.6,-36.25) -26.6,-37.65 -26.13,-38.12 v1(-20.955,-38.12) ; J3.2@-22.3,-54.96 -24.3,-56.96 -24.3,-58.7 -23.525,-59.475 19.519,-59.475 v1(20.272,-58.722) ; v1(-21.3,-39.175) -21.3,-38.464 v1(-20.955,-38.12) ; -17.025,-40.475 C12.1@-17.025,-38.15 ; v1(-9.15,-48.35) -18.725,-38.775 -20.3,-38.775 v1(-20.955,-38.12) ; C32_U_MPPT1.2@-6.575,-49.047 -6.575,-50.175 -4.25,-52.5 v1(-1.65,-52.5) ; v1(-1.65,-55.3) 2.525,-59.475 ; v1(23.297,-58.722) C32_U_MPPT2.2@32.65,-58.722
  Bottom Layer w0.25: v1(-50.075,5.625) -48.825,4.375 -48.825,-9.175 v1(-48.475,-9.525) ; C13.1@-22.45,-36.625 v1(-20.955,-38.12) ; C9.1@-21.3,-40.5 v1(-21.3,-39.175)
  Bottom Layer w0.3: C2.1@-40.9,-36.9 v1(-39.6,-36.9)
  Bottom Layer w0.5: v1(-45.5,-13.425) -44.8,-13.425 v1(-40.45,-9.075) ; v1(-37.175,-27.35) v1(-34.475,-27.35) ; v1(-32.85,-3.95) -30.75,-1.85 v1(-30.75,-1.175) ; R1.2@-28.7,-33.803 -27.647,-33.803 -27.3,-34.15 ; v1(-27.3,-32.525) -27.3,-35.55 v1(-26.6,-36.25) ; J3.2@-22.3,-54.96 -20.55,-53.21 v1(-20.55,-53.125) ; v1(-9.15,-48.35) -7.325,-50.175 v1(-6.55,-50.175) ; v1(-1.65,-55.3) v1(-1.65,-52.5) ; v1(20.272,-58.722) v1(23.297,-58.722)
"12V MEASURE": IC1.6 R12.2 R14.1 | length 87.9
  Top Layer w0.25: R14.1@-49.1,31.3 -49.1,29.35 -48.15,28.4 -43.7,28.4 -42.5,27.2 -42.5,6.3 -43.325,5.475 -43.325,-2.55 -42.225,-3.65 -42.225,-12.45 -32.7,-21.975 v1(-31.7,-21.975) ; v1(-24.675,-29.95) -24.675,-33.5 -21.975,-36.2 -20.875,-36.2 -20.295,-35.62 IC1.6@-19.258,-35.62
  Top Layer w1: R12.2@-51.5,31.271 R14.1@-49.129,31.271
  Bottom Layer w0.3: v1(-31.7,-21.975) -31.7,-22.925 v1(-24.675,-29.95)
/RESET: C11.1 IC1.58 J3.3 R4.1 U8.1 | length 21.3
  Top Layer w0.25: IC1.58@-24.558,-40.42 -24.558,-42.217 v1(-24.175,-42.6)
  Top Layer w0.3: C11.1@-24.175,-51.25 U8.1@-22.875,-51.25 ; v1(-21.525,-47.975) -21.525,-49.525 -22.675,-50.675 U8.1@-22.675,-51.05 -21.8,-51.925 -21.8,-53.375 -21.025,-54.15 ; -21.025,-54.125 -21.025,-56.235 J3.3@-19.76,-57.5
  Bottom Layer w0.25: v1(-24.175,-42.6) -21.6,-45.175 v1(-21.525,-47.975)
ADC0: C39_U_MPPT2.1 IC1.59 R46_U_MPPT2.2 | length 16.5
  Top Layer w0.25: IC1.59@-24.058,-40.42 -24.058,-41.667 -22.75,-42.975 -20.2,-42.975 -13.85,-49.325 R46_U_MPPT2.2@-13.85,-51.172
ADC1: IC1.60
ADC2: IC1.61 U6_U_MPPT2.6 | length 68.8
  Top Layer w0.25: IC1.61@-23.058,-40.42 -23.058,-41.394 -22.377,-42.075 -17.05,-42.075 -9.925,-49.2 -9.925,-50.15 -6.3,-53.775 8.125,-53.775 9.775,-55.425 12.95,-55.425 14.375,-54 17.875,-54 19.9,-56.025 35.45,-56.025 36.05,-56.625 U6_U_MPPT2.6@36.05,-57.275
ADC3: C39_U_MPPT1.1 IC1.2 R46_U_MPPT1.2 | length 12.3
  Top Layer w0.25: IC1.2@-19.258,-37.62 -18.42,-37.62 -17.75,-36.95 -13.875,-36.95 -12.222,-38.603 R46_U_MPPT1.2@-12.222,-42.95
ADC4: IC1.3
ADC5: IC1.4 U6_U_MPPT1.6 | length 21.9
  Top Layer w0.3: IC1.4@-19.258,-36.62 -18.22,-36.62 -17.925,-36.325 -13.275,-36.325 -2.575,-47.025 U6_U_MPPT1.6@-2.575,-47.7
ADC6: IC1.5 R13.2 R15.1 | length 83.6
  Top Layer w0.25: R13.2@-44.2,31.271 -41.75,28.821 -41.75,5.775 -42.5,5.025 -42.5,-2.05 -41.375,-3.175 -41.375,-12.25 v1(-32.8,-20.825) ; v1(-25.7,-30.65) -25.7,-33.475 -22.275,-36.9 -20.925,-36.9 -20.145,-36.12 IC1.5@-19.258,-36.12
  Top Layer w1: R15.1@-46.6,31.3 R13.2@-44.229,31.3
  Bottom Layer w0.3: v1(-32.8,-20.825) -32.8,-23.55 v1(-25.7,-30.65)
BATT_VCC: C19.1 C22.1 R32.2 R33.2 U4.3 U5.18 | length 30.6
  Top Layer w0.25: v1(-37.4,13.275) U5.18@-37.4,14.48 ; v1(-37,18.375) -36.7,18.675 -34.075,18.675 -33,19.75 U4.3@-33,20.9 ; R33.2@-36.2,4.503 R32.2@-34.8,4.503 v1(-34.8,3.375)
  Bottom Layer w0.25: C19.1@-37.4,12.1 -39.05,10.45 -39.05,5.75 -36.675,3.375 v1(-34.8,3.375)
  Bottom Layer w0.3: C19.1@-37.4,12.1 v1(-37.4,13.275) -36.9,13.775 C22.1@-36.9,14.7 -37,14.8 v1(-37,18.375) ; C22.1@-36.975,14.775 -36.975,17.15
CAN+12V: C6.1 C7.1 C8.1 D1.K F1.2 Q1.5 Q1.6 Q1.7 Q1.8 R2.2 R3.1 R12.1 U3.7 | length 88.9
  Top Layer w0.3: -55.4,-23.725 -53.2,-23.725 v1(-53.125,-23.8) ; v1@-53.025,-23.7 U3.7@-51.9,-23.7
  Top Layer w1: F1.2@-60.4,-43.175 D1.K@-60.4,-37.9 ; C6.1@-58.2,-24.7 R2.2@-55.397,-24.7 ; R12.1@-51.5,34.7 -51.5,43.325
  Top Layer w2: -59.9,-26.4 -61.025,-25.275 -61.025,-15.625 -55.925,-10.525 -52.15,-10.525 -47.175,-5.55 v1@-47.175,1.676
  Top Layer w3: F1.2@-59.3,-43.015 -59.9,-42.415 -59.9,-26.4 C6.1@-58.2,-24.7
  Bottom Layer w0.3: v1(-53.125,-23.8) -52.675,-23.35 C8.1@-50.45,-23.35
  Bottom Layer w2: -47.175,10.05 -47.173,9.65 -47.168,8.675 -47.135,1.95 -47.13,0.875 v1(-47.125,-0.075)
  other v1: -47.175,0.875 -47.15,1.95 -47.175,8.675 -47.15,9.65 -47.175,10.575
CAN_5V_RAIL: J1.1 J2.1 | length 20.4
  Bottom Layer w1: J2.1@-50.6,-52.9 -50.6,-51.35 -49.4,-50.15 -35.425,-50.15 -34.5,-51.075 J1.1@-34.5,-52.9
CAN_CS: IC1.44 R1.1 U2.18 | length 10.8
  Top Layer w0.25: U2.18@-38.22,-38.2 -37.425,-38.2 -35.741,-36.516 -33.016,-36.516 -32.62,-36.12 ; IC1.44@-31.358,-36.12 -30.32,-36.12 v1(-29.975,-35.775)
  Top Layer w0.3: -32.62,-36.12 IC1.44@-31.358,-36.12
  Bottom Layer w0.25: v1(-29.975,-35.775) -29.4,-35.2 R1.1@-28.7,-35.2
CAN_H: J1.4 J2.4 U1.7 | length 29.9
  Top Layer w0.3: U1.7@-51.465,-45.4 -51.465,-47.36 -47.275,-51.55 -47.275,-54.376 J2.4@-47.984,-55.084 -45.418,-57.65 -34.449,-57.65 J1.4@-31.884,-55.084
CAN_INT: IC1.27 U2.13 | length 21.1
  Top Layer w0.25: U2.13@-38.22,-41.45 -32.9,-41.45 -26.558,-35.108 IC1.27@-26.558,-28.32
CAN_L: J1.5 J2.5 U1.6 | length 43.1
  Top Layer w0.3: U1.6@-52.735,-45.4 -52.735,-47.64 -48.568,-51.807 J2.5@-48.568,-52.9 -49.643,-53.975 -51.625,-53.975 -52.325,-54.675 -52.325,-57.1 -50.825,-58.6 -33.5,-58.6 -30.75,-55.85 -30.75,-54.618 J1.5@-32.468,-52.9
CAN_SWITCH: IC1.33 R9.1 | length 11.5
  Top Layer w0.25: R9.1@-39.2,-23.7 -39.2,-25.05 -38.025,-26.225 -37.025,-26.225 -32.63,-30.62 IC1.33@-31.358,-30.62